# Altium PCB Cube Brain.PcbDoc
Units mm, origin at the board's own origin, x right, y up, seen from the top; angles counter-clockwise.
Board outline 36.4 x 36.4 mm, 4 copper layers (Top Layer, Layer 1, Layer 2, Bottom Layer), stack 1.571 mm thick; 89 components, 64 nets, 260 pads, 177 vias.
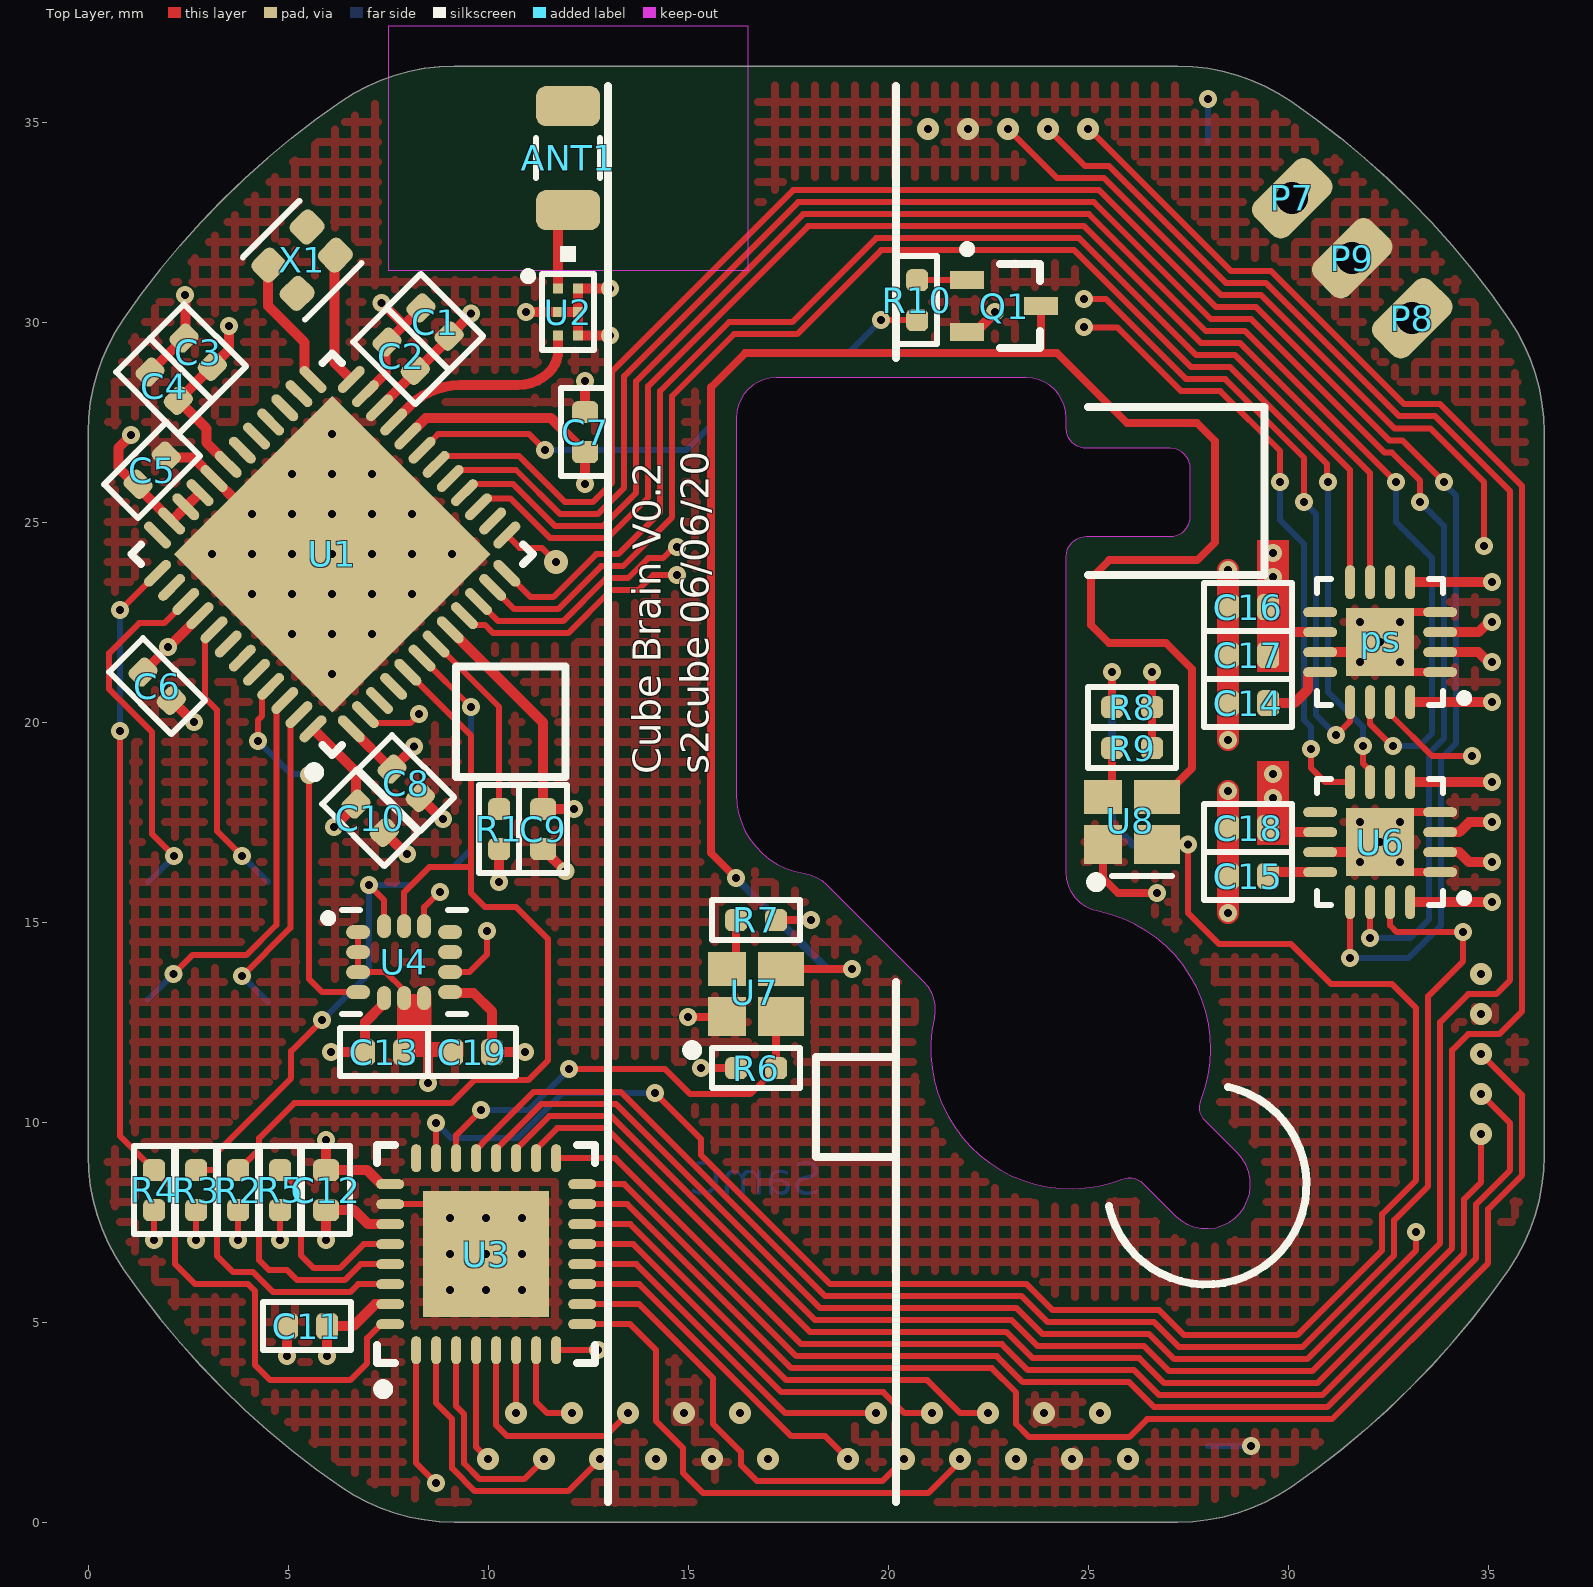
[diagram p0: Top Layer view]
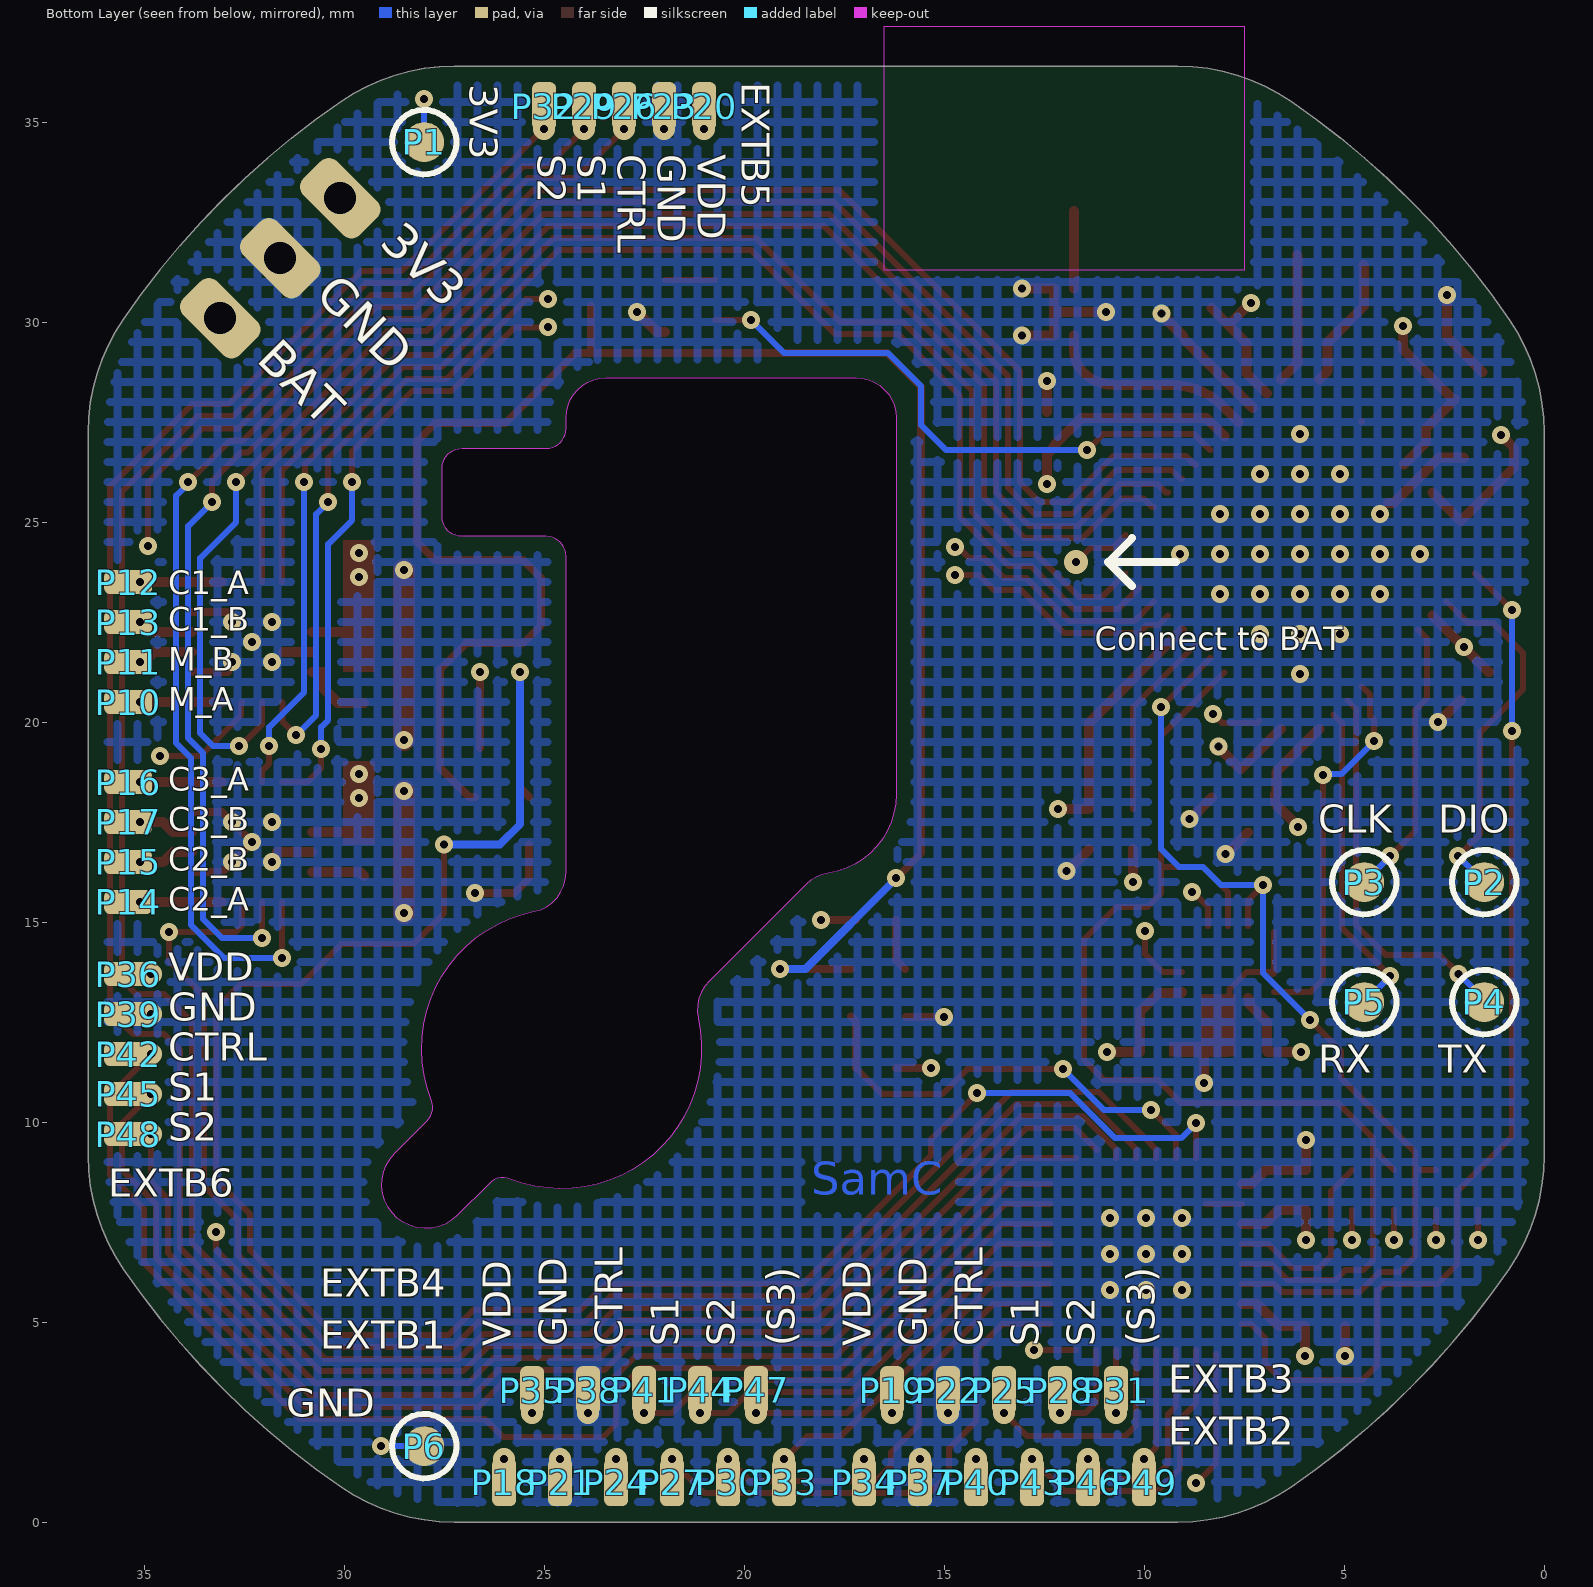
[diagram p1: Bottom Layer view, seen from below]
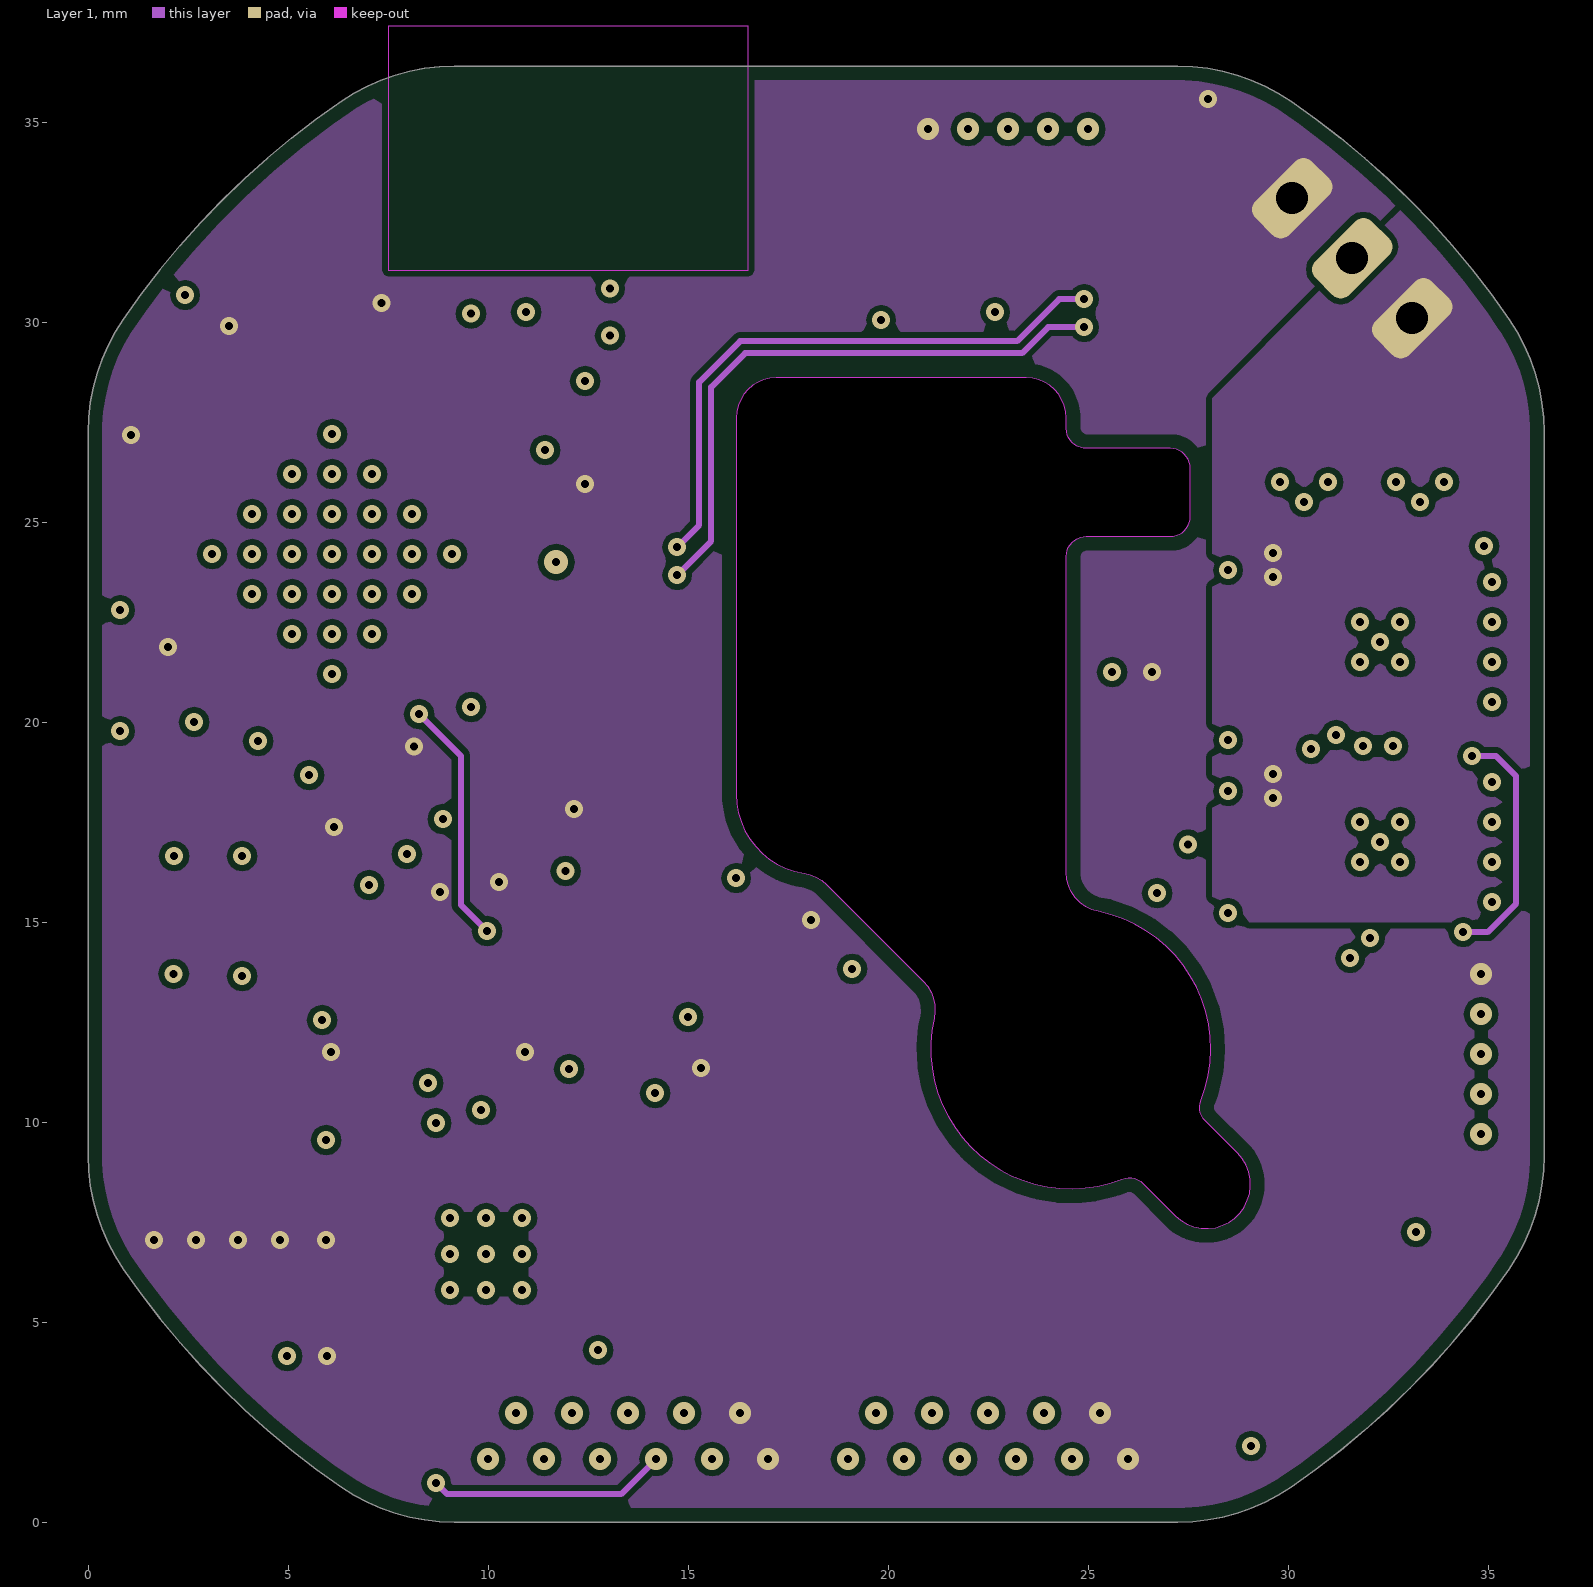
[diagram p2: Layer 1]
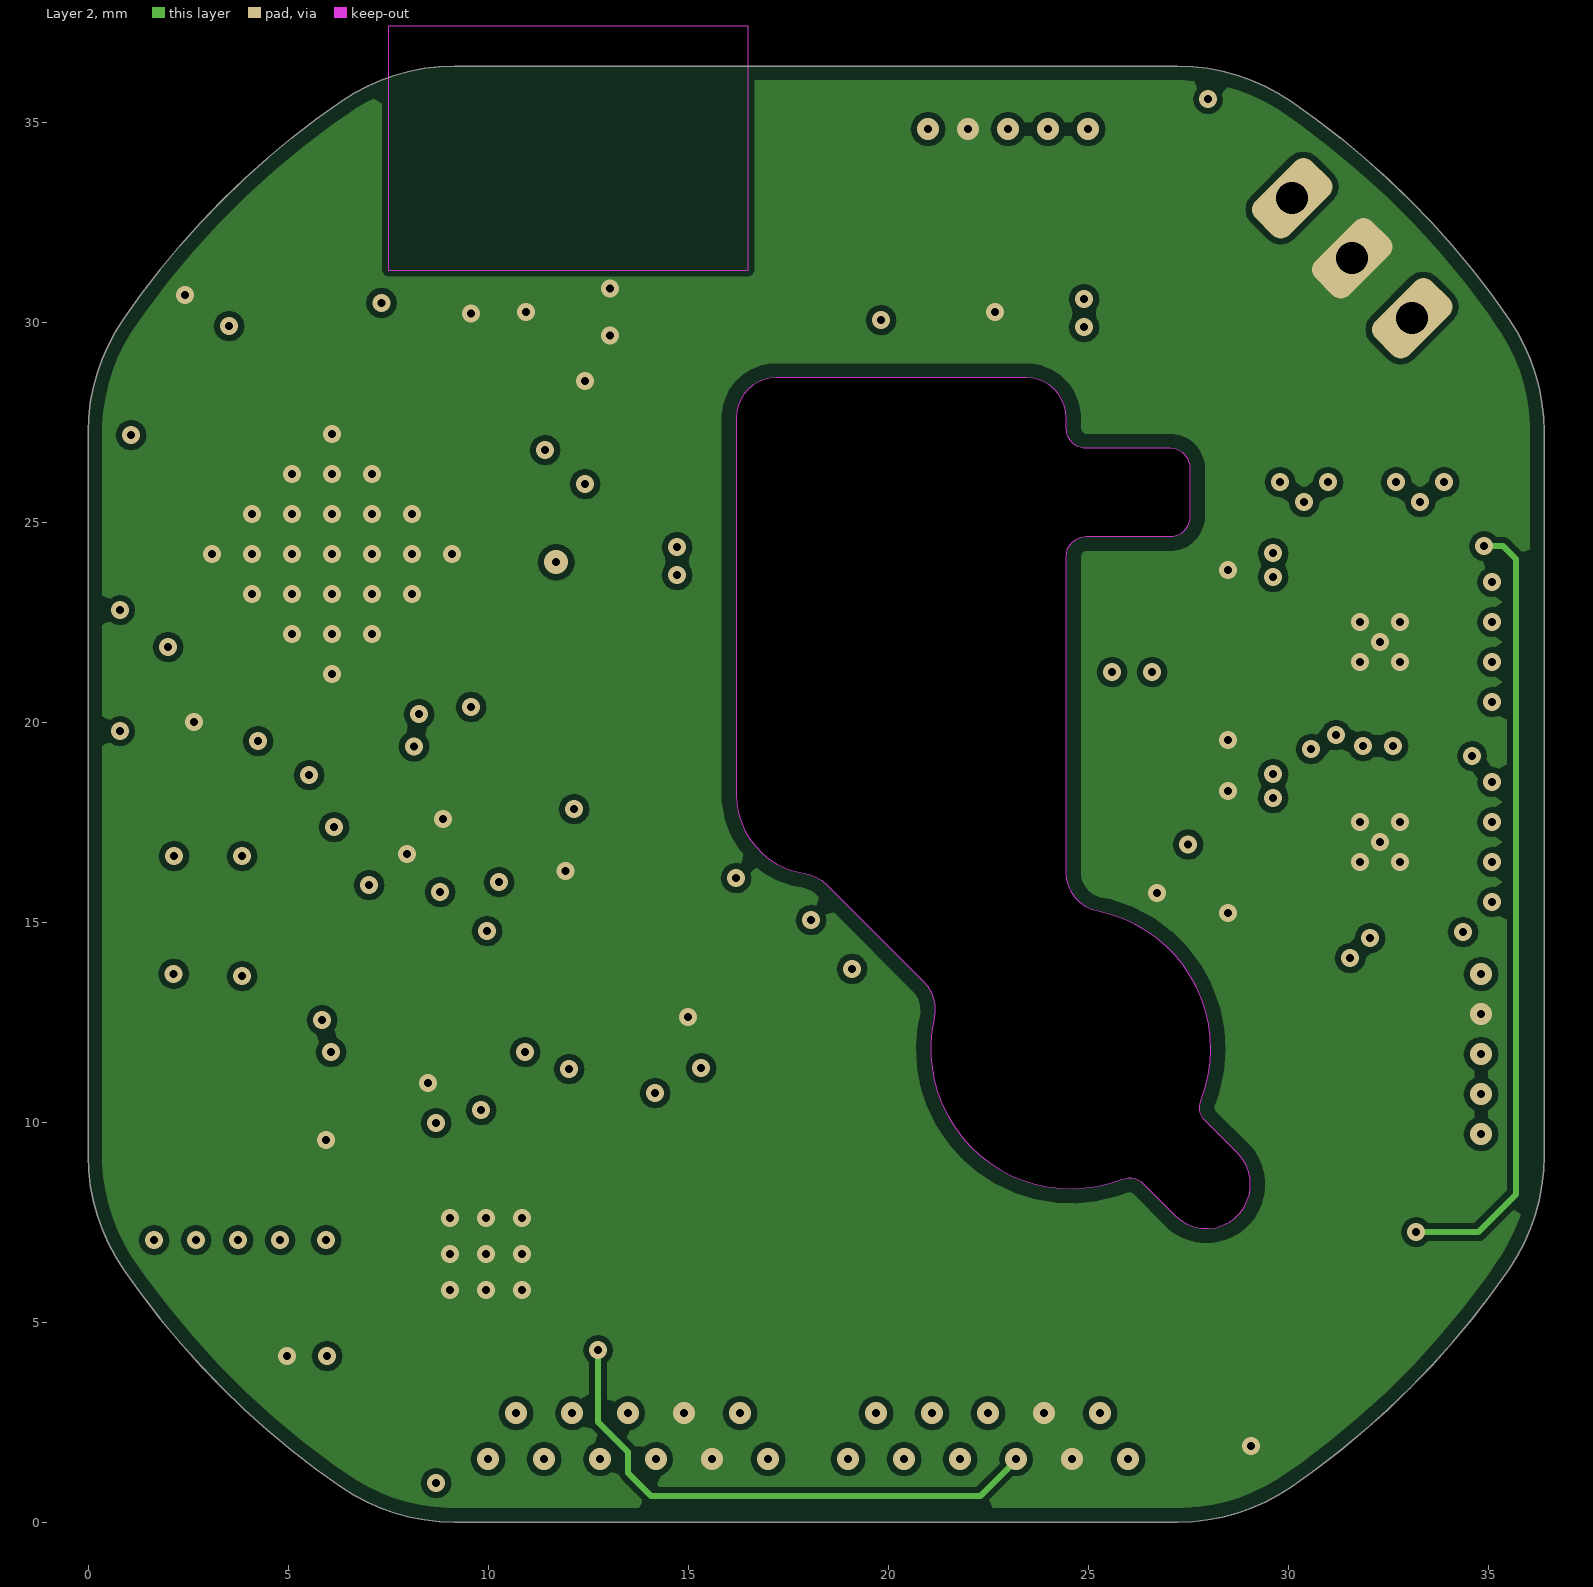
[diagram p3: Layer 2]
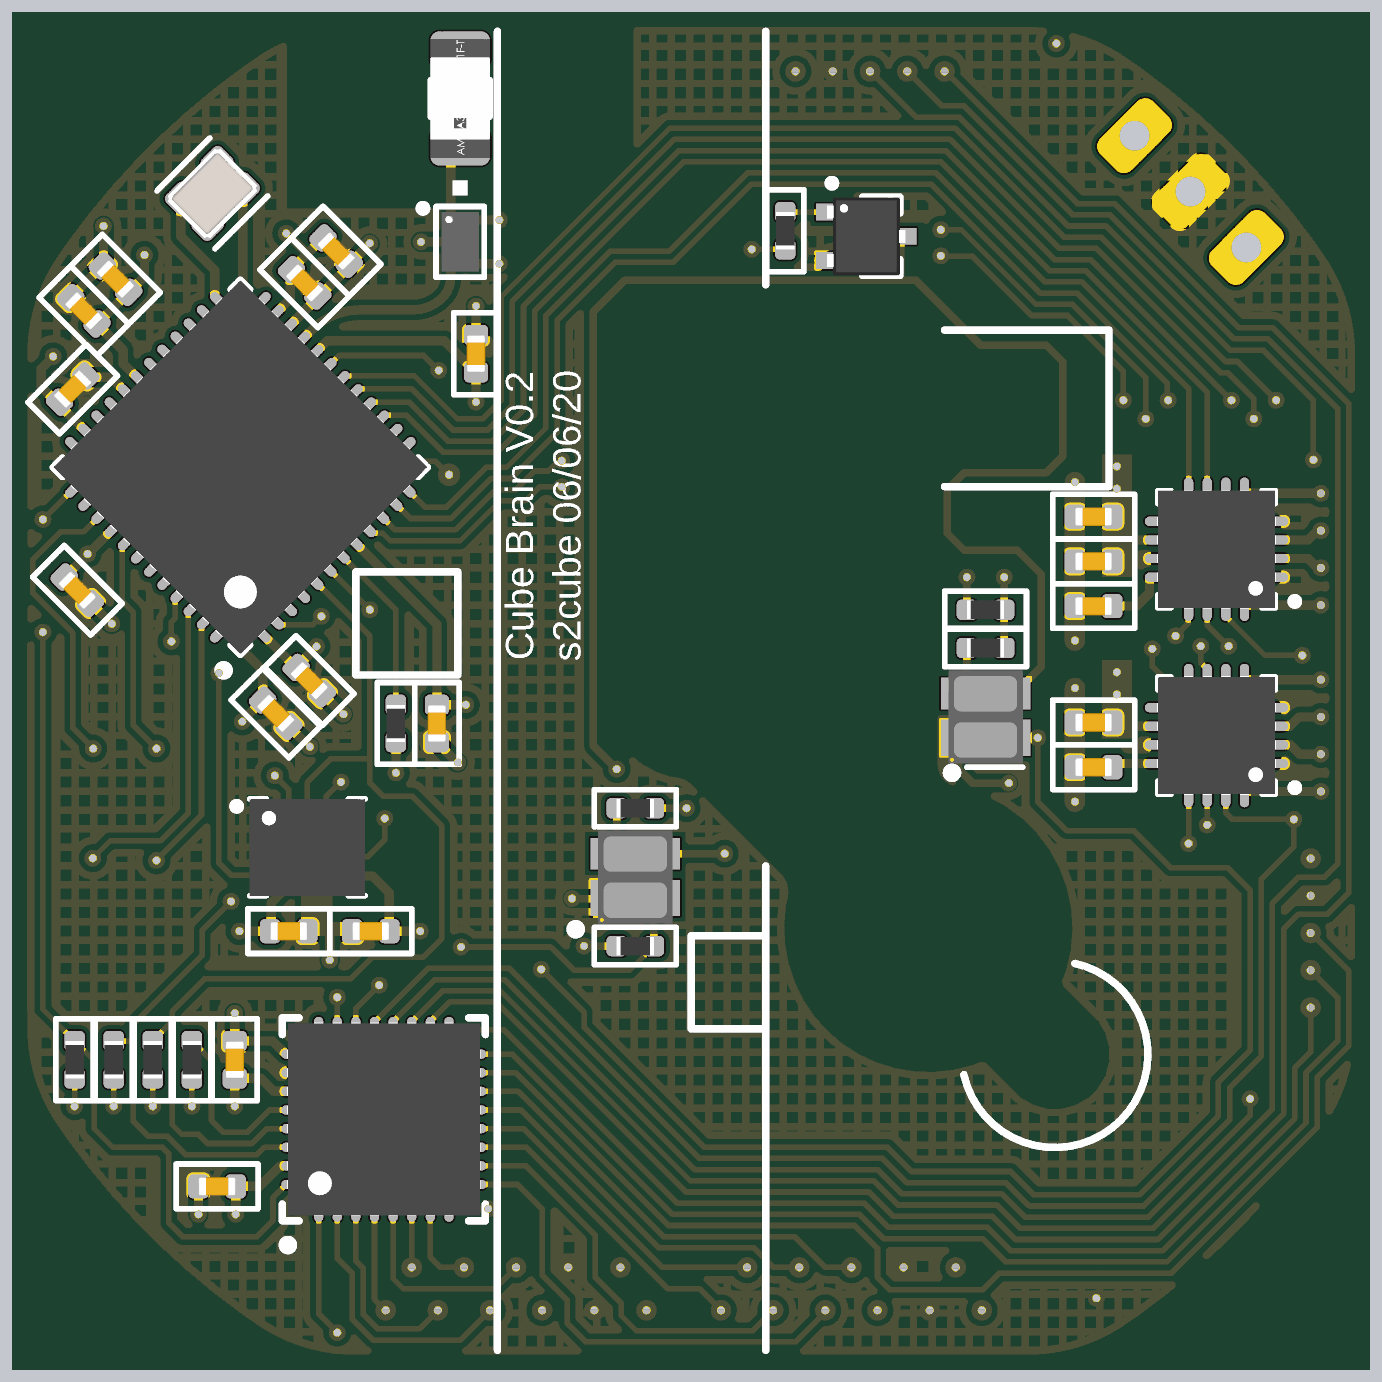
[diagram p4: 3D render of the assembled board from above, using the file's embedded part models]

## Layer stack, top to bottom
Top Solder: solder mask 0.0102, Solder Resist, Dk 3.5
Top Layer: signal copper 0.035
Dielectric 2: prepreg 0.2, PP-006, Dk 4.1
Layer 1: signal copper 0.018
Dielectric 1: dielectric 1.065, FR-4, Dk 4.8
Layer 2: signal copper 0.018
Dielectric 3: prepreg 0.2, PP-006, Dk 4.1
Bottom Layer: signal copper 0.035
Bottom Solder: solder mask 0.0102, Solder Resist, Dk 3.5

## Board outline
6.332,0.875 cw(c18.2,18.2) 0.875,6.332 cw(c5,9.158) 0,9.158 0,27.242 cw(c5,27.242) 0.875,30.068 cw(c18.2,18.2) 6.332,35.525 cw(c9.158,31.4) 9.158,36.4 27.242,36.4 cw(c27.242,31.4) 30.068,35.525 cw(c18.2,18.2) 35.525,30.068 cw(c31.4,27.242) 36.4,27.242 36.4,9.158 cw(c31.4,9.158) 35.525,6.332 cw(c18.2,18.2) 30.068,0.875 cw(c27.242,5) 27.242,0 9.158,0 cw(c9.158,5)
cut-out: 18.459,15.941 20.879,13.521 cw(c20.172,12.814) 21.148,12.597 ccw(c24.564,11.836) 25.842,8.578 cw(c26.025,8.112) 26.378,8.466 27.18,7.664 ccw(c27.958,8.442) 28.736,9.22 27.934,10.022 cw(c28.288,10.375) 27.822,10.558 ccw(c24.564,11.836) 25.255,15.267 cw(c25.452,16.248) 24.452,16.248 24.452,24.144 cw(c24.952,24.144) 24.952,24.644 27.052,24.644 ccw(c27.052,25.144) 27.552,25.144 27.552,26.344 ccw(c27.052,26.344) 27.052,26.844 24.952,26.844 cw(c24.952,27.344) 24.452,27.344 24.452,27.608 ccw(c23.452,27.608) 23.452,28.608 17.2,28.608 ccw(c17.2,27.608) 16.2,27.608 16.2,18.2 ccw(c18.2,18.2) 17.901,16.223 cw(c17.752,15.234)

## Design rules (kind name [scope] priority, off if disabled: settings)
BoardOutlineClearance [All] p1: gap=0.35 ignorepadtopadclearanceinfootprint=FALSE
Clearance [All] p1: gap=0.15 ignorepadtopadclearanceinfootprint=FALSE except(0.25: Arc-Hole Track-Hole SMDPad-Hole THPad-Hole Via-Hole Fill-Hole Poly-Hole Region-Hole Text-Hole)
ComponentClearance [All] p1: gap=0.1 collisioncheckmode=3 verticalgap=0.2 showdistances=TRUE
DiffPairsRouting [All] p1: maxlimit=100 minlimit=0.15 mostfreqgap=0.15 toplayer_minwidth=0.15 toplayer_maxwidth=10 toplayer_prefwidth=0.15 midlayer1_minwidth=0.15 midlayer1_maxwidth=10 midlayer1_prefwidth=0.15 midlayer2_minwidth=0.15 midlayer2_maxwidth=10 midlayer2_prefwidth=0.15 bottomlayer_minwidth=0.15 bottomlayer_maxwidth=10 bottomlayer_prefwidth=0.15 maxuncoupledlength=12.7
Height [All] p1: minheight=0 maxheight=100 prefheight=10
HoleSize [All] p1: absolutevalues=TRUE maxlimit=6.3 minlimit=0.2 maxpercent=80.000 minpercent=20.000
HoleToHoleClearance [All] p1: gap=0.5 allowstackedmicrovias=TRUE
MinimumAnnularRing [All] p1: minimumring=0.12
MinimumSolderMaskSliver [All] p1: minsoldermaskwidth=0
PlaneClearance [All] p1: clearance=0.2
PlaneConnect [All] p1: planeconnectstyle=Direct reliefexpansion=0.3 reliefentries=4 reliefconductorwidth=0.2 reliefairgap=0.2
PolygonConnect [All] p1: connectstyle=Direct reliefconductorwidth=0.2 reliefentries=4 polygonreliefangle="90 Angle" airgapwidth=0.2
RoutingCorners [All] p1: cornerstyle=45-Degree minsetback=2.5 maxsetback=2.5
RoutingVias [All] p1: holewidth=0.2 width=0.45 viastyle="Through Hole" minholewidth=0.2 minwidth=0.45 maxholewidth=6.3 maxwidth=10
SilkToSilkClearance [All] p1: silktosilkclearance=0
SilkToSolderMaskClearance [IsPad] p1: minsilkscreentomaskgap=0 clearancetoexposedcopper=TRUE
SolderMaskExpansion [All] p1: expansion=0.05 istentingtop=FALSE
Width [All] p1: maxlimit=50 minlimit=0.15 preferedwidth=0.15
19 further rules are at their usual default settings.

## Components (designator, comment, footprint, x,y, rotation, side; value= is the part's Value field where it differs from the comment)
ANT1 "AMCA31-2R450G-S1F-T3" AMCA31-2R450G-S1F-T3 12,34.1 r0 top
C1 "100nF" CAPC0402X05N 8.671,30.004 r315 top
C2 "100pF" CAPC0402X05N 7.825,29.15 r315 top
C3 "10uF" CAPC0402X05N 2.75,29.25 r135 top
C4 "10uF" CAPC0402X05N 1.9,28.4 r135 top
C5 "100nF" CAPC0402X05N 1.6,26.3 r45 top
C6 "100nF" CAPC0402X05N 1.725,20.9 r315 top
C7 "100nF" CAPC0402X05N 12.425,27.25 r90 top
C8 "100nF" CAPC0402X05N 7.95,18.475 r315 top
C9 "100nF" CAPC0402X05N 11.375,17.325 r270 top
C10 "100nF" CAPC0402X05N 7.05,17.6 r315 top
C11 "100nF" CAPC0402X05N 5.475,4.9 r180 top
C12 "100nF" CAPC0402X05N 5.95,8.3 r90 top
C13 "100nF" CAPC0402X05N 7.4,11.75 r0 top
C14 "4.7uF" CAPC0402X05N 29,20.475 r180 top
C15 "4.7uF" CAPC0402X05N 29,16.15 r180 top
C16 "10uF" CAPC0402X05N 29,22.875 r180 top
C17 "100nF" CAPC0402X05N 29,21.675 r180 top
C18 "100nF" CAPC0402X05N 29,17.35 r180 top
C19 "100nF" CAPC0402X05N 9.6,11.75 r180 top
P1 "PAD_3" R_PAD 28,34.5 r270 bottom locked
P2 "PAD_3" R_PAD 1.5,16 r270 bottom
P3 "PAD_3" R_PAD 4.5,16 r270 bottom
P4 "PAD_3" R_PAD 1.5,13 r270 bottom
P5 "PAD_3" R_PAD 4.5,13 r270 bottom
P6 "PAD_3" R_PAD 28,1.9 r270 bottom locked
P7 "PAD_2" BATT_PAD 30.1,33.1 r135 top locked
P8 "PAD_2" BATT_PAD 33.1,30.1 r135 top locked
P9 "PAD_2" BATT_PAD 31.6,31.6 r135 top locked
P10 "PAD_4" PAD_B2B 35.4,20.5 r0 bottom
P11 "PAD_4" PAD_B2B 35.4,21.5 r0 bottom
P12 "PAD_4" PAD_B2B 35.4,23.5 r0 bottom
P13 "PAD_4" PAD_B2B 35.4,22.5 r0 bottom
P14 "PAD_4" PAD_B2B 35.4,15.5 r0 bottom
P15 "PAD_4" PAD_B2B 35.4,16.5 r0 bottom
P16 "PAD_4" PAD_B2B 35.4,18.5 r0 bottom
P17 "PAD_4" PAD_B2B 35.4,17.5 r0 bottom
P18 "PAD_4" PAD_B2B 26,1 r90 bottom
P19 "PAD_4" PAD_B2B 16.3,3.3 r90 bottom
P20 "PAD_4" PAD_B2B 21,35.4 r270 bottom
P21 "PAD_4" PAD_B2B 24.6,1 r90 bottom
P22 "PAD_4" PAD_B2B 14.9,3.3 r90 bottom
P23 "PAD_4" PAD_B2B 22,35.4 r270 bottom
P24 "PAD_4" PAD_B2B 23.2,1 r90 bottom
P25 "PAD_4" PAD_B2B 13.5,3.3 r90 bottom
P26 "PAD_4" PAD_B2B 23,35.4 r270 bottom
P27 "PAD_4" PAD_B2B 21.8,1 r90 bottom
P28 "PAD_4" PAD_B2B 12.1,3.3 r90 bottom
P29 "PAD_4" PAD_B2B 24,35.4 r270 bottom
P30 "PAD_4" PAD_B2B 20.4,1 r90 bottom
P31 "PAD_4" PAD_B2B 10.7,3.3 r90 bottom
P32 "PAD_4" PAD_B2B 25,35.4 r270 bottom
P33 "PAD_4" PAD_B2B 19,1 r90 bottom
P34 "PAD_4" PAD_B2B 17,1 r90 bottom
P35 "PAD_4" PAD_B2B 25.3,3.3 r90 bottom
P36 "PAD_4" PAD_B2B 35.4,13.7 r0 bottom
P37 "PAD_4" PAD_B2B 15.6,1 r90 bottom
P38 "PAD_4" PAD_B2B 23.9,3.3 r90 bottom
P39 "PAD_4" PAD_B2B 35.4,12.7 r180 bottom
P40 "PAD_4" PAD_B2B 14.2,1 r90 bottom
P41 "PAD_4" PAD_B2B 22.5,3.3 r90 bottom
P42 "PAD_4" PAD_B2B 35.4,11.7 r180 bottom
P43 "PAD_4" PAD_B2B 12.8,1 r90 bottom
P44 "PAD_4" PAD_B2B 21.1,3.3 r90 bottom
P45 "PAD_4" PAD_B2B 35.4,10.7 r0 bottom
P46 "PAD_4" PAD_B2B 11.4,1 r90 bottom
P47 "PAD_4" PAD_B2B 19.7,3.3 r90 bottom
P48 "PAD_4" PAD_B2B 35.4,9.7 r180 bottom
P49 "PAD_4" PAD_B2B 10,1 r90 bottom
ps "DRV8833RTYR" DRV8833CRTER 32.3,22 r180 top (schematic designator U5)
Q1 "SSM3K36TU" SSM3K36TU 22.9,30.4 r0 top
R1 "12K" RESC0402X04N 10.275,17.325 r270 top
R2 "12K" RESC0402X04N 3.75,8.3 r270 top
R3 "12K" RESC0402X04N 2.7,8.3 r270 top
R4 "12K" RESC0402X04N 1.65,8.3 r270 top
R5 "12K" RESC0402X04N 4.8,8.3 r270 top
R6 "330R" RESC0402X04N 16.7,11.35 r180 top
R7 "330R" RESC0402X04N 16.7,15.05 r0 top
R8 "330R" RESC0402X04N 26.1,20.375 r0 top
R9 "330R" RESC0402X04N 26.1,19.35 r0 top
R10 "330R" RESC0402X04N 20.725,30.55 r270 top
U1 "STM32WB50CGU5" STM32WB50CGU5 6.1,24.2 r135 top locked
U2 "MLPF-WB55-01E3" MLPF-WB55-01E3 12,30.25 r0 top
U3 "TCA6424ARGJR" TCA6424ARGJR 9.95,6.7 r90 top
U4 "LSM6DSMTR" LSM6DSMTR 7.9,14 r0 top
U6 "DRV8833RTYR" DRV8833CRTER 32.3,17 r180 top locked
U7 "VCNT2020" VCNT2020 16.7,13.2 r90 top locked
U8 "VCNT2020" VCNT2020 26.1,17.5 r90 top locked
X1 "32MHz" XRCGB32M000F1H01R0 5.35,31.55 r225 top

## Footprints (in the part's own frame and the unit in brackets; to place one, negate y for a bottom-side part, rotate by r counter-clockwise, add the part's x,y. Pads: shape width x height; smd on the part's side, far side on the other; paste and mask are expansions set on the pad)
AMCA31-2R450G-S1F-T3 [mm]
  rrect50% 1.6x1 smd: 1(0,-1.3) 2(0,1.3)
  silkscreen extent -0.8,-2.6 0.8,0.5, body extent -0.8,-1.6 0.8,1.6, height 1.21
BATT_PAD [mm]
  rrect50% 1.2x2 hole 0.8: 1(0,0)
CAPC0402X05N [mm] "Chip Capacitor, 2-Leads, Body 1.00x0.50mm, IPC Medium Density"
  rrect50% 0.55x0.65 smd: 1(-0.5,0) 2(0.5,0)
  silkscreen extent -1.1,-0.6 1.1,0.6, body extent -0.5,-0.25 0.5,0.25, height 0.5
DRV8833CRTER [mm] "QFN, 16-Leads, Body 3.00x3.00mm, Pitch 0.50mm, Thermal Pad 1.66x1.66mm, IPC Medium Density"
  oval 0.85x0.25 smd: 1(-1.5,0.75) 2(-1.5,0.25) 3(-1.5,-0.25) 4(-1.5,-0.75) 9(1.5,-0.75) 10(1.5,-0.25) 11(1.5,0.25) 12(1.5,0.75)
  oval 0.25x0.85 smd: 5(-0.75,-1.5) 6(-0.25,-1.5) 7(0.25,-1.5) 8(0.75,-1.5) 13(0.75,1.5) 14(0.25,1.5) 15(-0.25,1.5) 16(-0.75,1.5)
  rect 1.7x1.7 smd: 17(0,0)
  silkscreen extent -2.2,-1.58 1.58,1.58, body extent -1.6,-1.6 1.6,1.6, height 0.8
LSM6DSMTR [mm] "PQFN, 14-Leads, Body 3.00x2.50mm, Pitch 0.50mm, IPC Medium Density"
  oval 0.6x0.35 smd: 1(-1.15,0.75) 2(-1.15,0.25) 3(-1.15,-0.25) 4(-1.15,-0.75) 8(1.15,-0.75) 9(1.15,-0.25) 10(1.15,0.25) 11(1.15,0.75)
  oval 0.35x0.6 smd: 5(-0.5,-0.9) 6(0,-0.9) 7(0.5,-0.9) 12(0.5,0.9) 13(0,0.9) 14(-0.5,0.9)
  silkscreen extent -2,-1.3 1.55,1.3, body extent -1.55,-1.3 1.55,1.3, height 0.86
MLPF-WB55-01E3 [mm] "MLPF-WB55-01E3"
  rect 0.25x0.25 smd: 1(-0.25,0.587) 2(-0.25,0) 3(-0.25,-0.587) 4(0.25,-0.587) 5(0.25,0) 6(0.25,0.587)
  silkscreen extent -1.1,-0.95 0.65,1, body extent -0.5,-0.8 0.5,0.8, height 0.45
PAD_B2B [mm]
  rrect50% 1.2x0.6 smd: 1(0,0)
R_PAD [mm]
  round 1 smd: 1(0,0)
  silkscreen extent -0.81,-0.81 0.81,0.8
RESC0402X04N [mm] "Chip Resistor, 2-Leads, Body 1.00x0.50mm, IPC Medium Density"
  rrect50% 0.55x0.55 smd: 1(-0.5,0) 2(0.5,0)
  silkscreen extent -1.1,-0.5 1.1,0.5, body extent -0.5,-0.25 0.5,0.25, height 0.35
SSM3K36TU [mm] "SOTFL, 3-Leads, Body 2.00x2.10mm, Pitch 0.65mm, IPC Medium Density"
  rect 0.85x0.45 smd: 1(-0.925,0.65) 2(-0.925,-0.65) 3(0.925,0)
  silkscreen extent -1.02,-1.05 0.9,1.52, body extent -1.05,-1.05 1.05,1.05, height 0.75
STM32WB50CGU5 [mm] "QFN, 48-Leads, Body 7.00x7.00mm, Pitch 0.50mm, Thermal Pad 5.60x5.60mm, IPC Medium Density"
  oval 0.85x0.25 smd: 1(-3.425,2.75) 2(-3.425,2.25) 3(-3.425,1.75) 4(-3.425,1.25) 5(-3.425,0.75) 6(-3.425,0.25) 7(-3.425,-0.25) 8(-3.425,-0.75) 9(-3.425,-1.25) 10(-3.425,-1.75) 11(-3.425,-2.25) 12(-3.425,-2.75) 25(3.425,-2.75) 26(3.425,-2.25) 27(3.425,-1.75) 28(3.425,-1.25) 29(3.425,-0.75) 30(3.425,-0.25) 31(3.425,0.25) 32(3.425,0.75) 33(3.425,1.25) 34(3.425,1.75) 35(3.425,2.25) 36(3.425,2.75)
  oval 0.25x0.85 smd: 13(-2.75,-3.425) 14(-2.25,-3.425) 15(-1.75,-3.425) 16(-1.25,-3.425) 17(-0.75,-3.425) 18(-0.25,-3.425) 19(0.25,-3.425) 20(0.75,-3.425) 21(1.25,-3.425) 22(1.75,-3.425) 23(2.25,-3.425) 24(2.75,-3.425) 37(2.75,3.425) 38(2.25,3.425) 39(1.75,3.425) 40(1.25,3.425) 41(0.75,3.425) 42(0.25,3.425) 43(-0.25,3.425) 44(-0.75,3.425) 45(-1.25,3.425) 46(-1.75,3.425) 47(-2.25,3.425) 48(-2.75,3.425)
  rect 5.6x5.6 smd: 49(0,0)
  silkscreen extent -3.66,-3.55 3.55,4.3, body extent -3.57,-3.57 3.57,3.57, height 0.6
TCA6424ARGJR [mm] "QFN, 32-Leads, Body 5.00x5.00mm, Pitch 0.50mm, Thermal Pad 3.15x3.15mm, IPC Medium Density"
  oval 0.7x0.25 smd: 1(-2.4,1.75) 2(-2.4,1.25) 3(-2.4,0.75) 4(-2.4,0.25) 5(-2.4,-0.25) 6(-2.4,-0.75) 7(-2.4,-1.25) 8(-2.4,-1.75) 17(2.4,-1.75) 18(2.4,-1.25) 19(2.4,-0.75) 20(2.4,-0.25) 21(2.4,0.25) 22(2.4,0.75) 23(2.4,1.25) 24(2.4,1.75)
  oval 0.25x0.7 smd: 9(-1.75,-2.4) 10(-1.25,-2.4) 11(-0.75,-2.4) 12(-0.25,-2.4) 13(0.25,-2.4) 14(0.75,-2.4) 15(1.25,-2.4) 16(1.75,-2.4) 25(1.75,2.4) 26(1.25,2.4) 27(0.75,2.4) 28(0.25,2.4) 29(-0.25,2.4) 30(-0.75,2.4) 31(-1.25,2.4) 32(-1.75,2.4)
  rect 3.15x3.15 smd: 33(0,0)
  silkscreen extent -3.5,-2.73 2.73,2.73, body extent -2.6,-2.6 2.6,2.6, height 0.6
VCNT2020 [mm] "4-SMD"
  rect 0.97x0.95 smd: 1(-0.56,0.725)
  rect 0.97x1.15 smd: 2(-0.56,-0.625)
  rect 0.85x0.95 smd: 3(0.63,0.725)
  rect 0.85x1.15 smd: 4(0.63,-0.625)
  silkscreen extent -1.52,-1 1.35,1.72, body extent -1.25,-1 1.25,1, height 0.81
XRCGB32M000F1H01R0 [mm]
  rrect50% 0.75x0.7 smd: 1(-0.675,0.5) 2(-0.675,-0.5) 2(0.675,0.5) 3(0.675,-0.5)
  silkscreen extent -1,-1.1 1,1.1, body extent -1,-0.8 1,0.8, height 0.66

## Part data
ANT1: "RF ANT 2.4GHZ CHIP SOLDER SMD", Case=3.2X1.6X1.2mm, Manufacturer="Abracon LLC", Supplier Part Number 1=535-14095-1-ND, Categories="RF Antennas", Manufacturer Part Number=AMCA31-2R450G-S1F-T3, Supplier 1=Digi-Key
C1 C5 C6 C7 C8 C9 C10 C11 C12 C13 C17 C18 C19: library part "CER 100NF 16V", "CAP CER 0.1UF 16V X7R 0402", Manufacturer="Samsung Electro-Mechanics", Manufacturer Part Number=CL05B104KO5NNNC, Package / Case=0402, Supplier Part Number 1=C1525, Voltage - Rated=16V, Capacitance=100nF, Category=Capacitors, Supplier 1=LCSC
C2: library part "CER 100PF 50V", "CAP CER 100PF 50V C0G/NP0 0402", Manufacturer="Samsung Electro-Mechanics", Manufacturer Part Number=CL05C101JB5NNNC, Package / Case=0402, Supplier Part Number 1=C26409, Voltage - Rated=50V, Capacitance=100pF, Category=Capacitors, Supplier 1=LCSC
C3 C4 C16: library part "CER 10UF 10V", "CAP CER 10UF 10V X5R 0402", Manufacturer="Murata Electronics", Manufacturer Part Number=GRM155R61A106ME44D, Package / Case=0402, Supplier Part Number 1=C77000, Voltage - Rated=10V, Capacitance=10uF, Category=Capacitors, Supplier 1=LCSC
C14 C15: library part "CER 4.7UF 10V", "CAP CER 4.7UF 10V X5R 0402", Manufacturer="Samsung Electro-Mechanics", Manufacturer Part Number=CL05A475MP5NRNC, Package / Case=0402, Supplier Part Number 1=C23733, Voltage - Rated=10V, Capacitance=4.7uF, Category=Capacitors, Supplier 1=LCSC
P1 P2 P3 P4 P5 P6: "a Round Pad"
P7 P8 P9: "a Pad"
P10 P11 P12 P13 P14 P15 P16 P17 P18 P19 P20 P21 P22 P23 P24 P25 P26 P27 P28 P29 P30 P31 P32 P33 P34 P35 P36 P37 P38 P39 P40 P41 P42 P43 P44 P45 P46 P47 P48 P49: "a Pad for board to board connection"
ps U6: "IC MOTOR DRIVER", Case="16-WQFN Exposed Pad", Manufacturer="Texas Instruments", Supplier Part Number 1=C154936, Categories="Motor Drivers, Controllers", Manufacturer Part Number=DRV8833RTYR, Supplier 1=LCSC
Q1: "N-Channel 20V 500mA (Ta) 800mW (Ta) Surface Mount UFM", Case=UFM, Manufacturer="Toshiba Semiconductor and Storage", Supplier Part Number 1=Digi-Key, Categories=Transistors, Manufacturer Part Number=SSM3K36TU, Supplier 1=SSM3K36TULFCT-ND
R1 R2 R3 R4 R5: library part "RES 12K", "RES SMD 12K OHM 1% 1/16W 0402", Manufacturer=YAGEO, Manufacturer Part Number=RC0402FR-0712KL, Package / Case=0402, Supplier Part Number 1=C114760, Category=Resistors, Resistance=12K, Supplier 1=LCSC
R6 R7 R8 R9 R10: library part "RES 330R", "RES SMD 330R OHM 1% 1/16W 0402", Manufacturer=YAGEO, Manufacturer Part Number=RC0402FR-07330RL, Package / Case=0402, Supplier Part Number 1=C105875, Category=Resistors, Resistance=330R, Supplier 1=LCSC
U1: "ULTRA-LOW-POWER DUAL CORE ARM CO", Case="48-UFQFN Exposed Pad", Manufacturer=STMicroelectronics, Supplier Part Number 1=497-STM32WB50CGU5-ND, Categories="RF Transceiver ICs", Manufacturer Part Number=STM32WB50CGU5, Supplier 1=Digi-Key
U2: "RF FILTER LOW PASS 2.45GHZ 6SMD", Case="6-SMD, No Lead", Frequency="2.45GHz Center", Manufacturer=STMicroelectronics, Supplier Part Number 1=497-19088-1-ND, Bandwidth=100MHz, Categories="RF Filters", Manufacturer Part Number=MLPF-WB55-01E3, Supplier 1=Digi-Key
U3: "IC I/O EXPANDER I2C 24B 32UQFN", Case="32-UFQFN Exposed Pad", Manufacturer="Texas Instruments", Supplier Part Number 1=C80692, Categories="I/O Expanders", Manufacturer Part Number=TCA6424ARGJR, Supplier 1=LCSC
U4: "IMU ACCEL/GYRO I2C/SPI 14LGA", Case="14-VFLGA Module", Manufacturer=STMicroelectronics, Supplier Part Number 1=497-16696-1-ND, Categories="IMUs (Inertial Measurement Units)", Manufacturer Part Number=LSM6DSMTR, Supplier 1=Digi-Key
U7 U8: "REFLECTIVE SENSOR WITH PTR OUTPU", Case="4-SMD Module", Manufacturer="Vishay Semiconductor Opto Division", Supplier Part Number 1=161-2156, Category="Optical Sensors", Manufacturer Part Number=VCNT2020, Supplier 1=RS
X1: library part XRCGB32M000F1H01R0, "2.0X1.6X0.65MM 32MHZ CRYSTAL", Case=SMD, Manufacturer="Murata Electronics", Supplier Part Number 1=490-18334-1-ND, Categories=Crystals, Manufacturer Part Number=XRCGB32M000F1H01R0, Supplier 1=Digi-Key

## Via types
v1: diameter 0.45, hole 0.2, Top Layer to Bottom Layer, tented both sides, 144 vias
v2: diameter 0.55, hole 0.2, Top Layer to Bottom Layer, tented both sides, 32 vias
v3: diameter 0.6, hole 0.2, Top Layer to Bottom Layer, 1 vias

## Nets (pads, with @x,y where several pads share a name; then routed paths per layer and width w, separated by ;. In a path a pad name is that pad's centre, name@x,y a point inside that pad or via, vN(x,y) a via of type N, cw(c..) or ccw(c..) an arc to the next point about the centre after c; other vN are vias at no path point)
ANT: ANT1.1 U2.1 | length 1.9
  Top Layer w0.25: U2.1 ANT1.1@11.75,32.775
BATT+: C16.1 C17.1 C18.1 P8.1 ps.10 U6.10 | length 4.9
  Top Layer w0.2: P8.1@33.019,29.333 33.019,30.019 P8.1
  Top Layer w0.25: C18.1 29.6,17.25 U6.10 ; C16.1@29.625,22.9 29.5,22.775 29.5,21.725 30.025,22.25 ps.10
  other v1: 29.625,18.1 29.625,18.7 29.625,23.625 29.625,24.225
EXTB1_CTRL: P24.1 U3.8 | length 14.8
  Top Layer w0.15: U3.8 v1(12.75,4.3)
  Layer 2 w0.15: v1(12.75,4.3) 12.75,2.5 13.5,1.75 13.5,1.225 14.025,0.7 14.075,0.65 22.3,0.65 23.2,1.55 v2(23.2,1.575)
EXTB1_S1: P27.1 U3.9 | length 13
  Top Layer w0.15: U3.9 13.55,4.95 14.2,4.3 14.2,2.525 14.875,1.85 14.875,1.225 15.375,0.725 21,0.725 21.8,1.525 v2(21.8,1.575)
EXTB1_S2: P30.1 U3.10 | length 11
  Top Layer w0.15: U3.10 13.775,5.45 15.625,3.6 15.625,2.45 16.325,1.75 16.325,1.425 16.725,1.025 19.85,1.025 v2(20.4,1.575)
EXTB1_S3: P33.1 U3.11 | length 8.4
  Top Layer w0.15: U3.11@12.375,5.95 13.782,5.95 17.582,2.15 18.425,2.15 v2(19,1.575)
EXTB2_CTRL: P40.1 U3.1 | length 9.4
  Top Layer w0.15: U3.1@8.2,4.2 8.2,1.475 v1(8.7,0.975)
  Layer 1 w0.15: v1(8.7,0.975) 8.975,0.7 13.325,0.7 v2(14.2,1.575)
EXTB2_S1: P43.1 U3.2 | length 7.4
  Top Layer w0.15: U3.2 8.7,2.975 9.1,2.575 9.1,1.344 9.669,0.775 12,0.775 v2(12.8,1.575)
EXTB2_S2: P46.1 U3.3 | length 5.3
  Top Layer w0.15: U3.3 9.2,2.899 9.4,2.699 9.4,1.468 9.793,1.075 10.9,1.075 v2(11.4,1.575)
EXTB2_S3: P49.1 U3.4 | length 2.8
  Top Layer w0.15: U3.4 9.7,1.875 v2(10,1.575)
EXTB3_CTRL: P25.1 U3.5 | length 5.5
  Top Layer w0.15: U3.5 10.2,2.425 10.475,2.15 12.925,2.15 v2(13.5,2.725)
EXTB3_S1: P28.1 U3.7 | length 2.3
  Top Layer w0.15: U3.7 11.2,3 11.475,2.725 v2(12.1,2.725)
EXTB3_S2: P31.1 U3.6 | length 1.6
  Top Layer w0.15: v2(10.7,2.725) U3.6
EXTB4_CTRL: P41.1 U3.14 | length 12.1
  Top Layer w0.15: U3.14 13.555,7.45 17.455,3.55 20.982,3.55 21.807,2.725 v2(22.5,2.725)
EXTB4_S1: P44.1 U3.13 | length 10.5
  Top Layer w0.15: U3.13 13.631,6.95 17.331,3.25 19.882,3.25 20.407,2.725 v2(21.1,2.725)
EXTB4_S2: P47.1 U3.12 | length 8.9
  Top Layer w0.15: U3.12 13.706,6.45 17.431,2.725 v2(19.7,2.725)
EXTB5_CTRL: P26.1 U3.20 | length 64.8
  Top Layer w0.15: U3.20 10.2,9.325 11.325,10.45 13.201,10.45 18.301,5.35 23.213,5.35 23.863,4.7 26.526,4.7 27.153,4.074 30.475,4.074 33.2,6.799 v1(33.2,7.25) ; v2(23,34.825) 24.225,33.6 25.4,33.6 28.325,30.675 29.324,30.675 32.66,27.339 33.561,27.339 34.9,26 v1(34.9,24.4)
  Layer 2 w0.15: v1(33.2,7.25) 34.75,7.25 35.7,8.2 35.7,24.075 35.375,24.4 v1(34.9,24.4)
EXTB5_S1: P29.1 U3.19 | length 62.9
  Top Layer w0.15: U3.19 10.7,9.325 11.525,10.15 13.076,10.15 18.176,5.05 23.089,5.05 23.739,4.4 26.402,4.4 27.028,3.774 30.6,3.774 33.8,6.974 33.8,12.5 34.5,13.2 35.2,13.2 35.55,13.55 35.55,25.774 33.674,27.65 32.774,27.65 29.449,30.975 28.449,30.975 25.524,33.9 24.925,33.9 v2(24,34.825)
EXTB5_S2: P32.1 U3.18 | length 62
  Top Layer w0.15: U3.18@11.175,9.3 11.725,9.85 12.952,9.85 18.052,4.75 22.965,4.75 23.615,4.1 26.278,4.1 26.904,3.474 30.724,3.474 34.1,6.85 34.1,11.8 34.5,12.2 35.275,12.2 35.85,12.775 35.85,25.349 ; v2(25,34.825) 25.024,34.825 28.574,31.275 29.573,31.275 32.898,27.95 33.799,27.95 35.85,25.899 35.85,25.35
EXTB6_CTRL: P42.1 U3.15 | length 33.3
  Top Layer w0.15: U3.15 13.479,7.95 17.579,3.85 22.592,3.85 23.2,3.242 23.2,2.453 23.528,2.125 26.025,2.125 26.474,2.574 31.097,2.574 35,6.477 35,7.825 35.85,8.675 35.85,10.675 v2(34.825,11.7)
EXTB6_S1: P45.1 U3.16 | length 31
  Top Layer w0.15: U3.16 13.403,8.45 17.703,4.15 22.716,4.15 23.366,3.5 26.025,3.5 26.651,2.874 30.972,2.874 34.7,6.601 34.7,7.949 35.55,8.799 35.55,9.975 v2(34.825,10.7)
EXTB6_S2: P48.1 U3.17 | length 29.8
  Top Layer w0.15: U3.17 13.178,9.1 17.828,4.45 22.84,4.45 23.49,3.8 26.149,3.8 26.775,3.174 30.848,3.174 34.4,6.726 34.4,8.074 34.825,8.499 v2(34.825,9.7)
GND: C1.2 C2.2 C3.2 C4.2 C5.2 C6.2 C7.2 C8.2 C9.2 C10.2 C11.2 C12.2 C13.2 C14.2 C15.2 C16.2 C17.2 C18.2 C19.2 P6.1 P9.1 P21.1 P22.1 P23.1 P37.1 P38.1 P39.1 ps.1 ps.4 ps.11 ps.17 Q1.2 U1.22 U1.32 U1.49 U2.2 U2.4 U2.5 U2.6 U3.25 U3.26 U3.33 U4.1 U4.2 U4.3 U4.6 U4.7 U6.1 U6.4 U6.11 U6.17 U7.1 U8.1 | length 44.1
  Top Layer w0.15: U4.1 U4.2 U4.3 ; U4.3@6.775,13.7 6.75,13.725 U4.3 ; U3.26 U3.33@8.45,7.95 ; U4.6@7.925,13.15 7.862,13.213 7.862,13.329 7.441,13.75 U4.3 ; U7.1@15.96,12.625 U7.1
  Top Layer w0.2: v1(15,12.625) U7.1@15.96,12.625 ; U8.1 25.375,16.1 25.75,15.725 v1(26.725,15.725) ; ps.17@32.9,21.25 ps.1 ; ps.17@32.925,22.75 ps.4 ; U6.1 33.05,16.25 v1(32.3,17) v1(32.8,17.5) 33.05,17.75 U6.4
  Top Layer w0.25: C4.2 C3.2 2.428,29.636 2.428,30.672 v1(2.425,30.675) ; C5.2@2,26.6 2.013,26.613 2.626,26.613 U1.32 3.764,25.475 U1.49@3.9,25.475 ; C6.2 2.091,20.546 2.638,20 v1(2.65,20) ; v1(4.975,4.15) C11.2 ; v1(5.95,9.55) C12.2 6.975,8.8 7.325,8.45 U3.25 ; U1.22 8.95,29.525 C1.2@8.975,29.525 ; C10.2 v1@7.95,16.7 ; C13.2 8.5,11.75 ; C8.2 v1@8.85,17.575 ; v1(8.5,10.975) 8.5,11.75 ; C1.2 v1@9.571,30.196 ; C19.2@9.1,11.793 C19.2 8.5,11.75 ; v1(10.95,30.25) U2.2 U2.5 ; C9.2 v1@11.921,16.279 ; C7.2 v1(12.425,28.525) ; v1(13.05,29.663) U2.4 U2.5 ; v1(13.05,30.837) U2.6 U2.5 ; Q1.2 22.175,29.75 v1(22.675,30.25) ; U6.11 U6.17@31.675,16.75 ; ps.11 ps.17@31.525,21.75
  Top Layer w0.55: v1(28.5,15.225) C15.2 C18.2 v1(28.5,18.275) ; v1(28.5,19.55) C14.2 C17.2 C16.2 v1(28.5,23.8)
  Bottom Layer w0.15: P6.1 v1(29.075,1.9)
  other v1: 9.05,5.8 9.95,5.8 10.85,5.8 9.05,6.7 9.95,6.7 10.85,6.7 9.05,7.6 9.95,7.6 10.85,7.6 11.938,16.279 31.8,16.5 32.8,16.5 7.966,16.7 31.8,17.5 8.866,17.575 6.1,21.2 31.8,21.5 32.8,21.5 32.3,22 5.1,22.2 6.1,22.2 7.1,22.2 31.8,22.5 32.8,22.5 4.1,23.2 5.1,23.2 6.1,23.2 7.1,23.2 8.1,23.2 3.1,24.2 4.1,24.2 5.1,24.2 6.1,24.2 7.1,24.2 8.1,24.2 9.1,24.2 4.1,25.2 5.1,25.2 6.1,25.2 7.1,25.2 8.1,25.2 5.1,26.2 6.1,26.2 7.1,26.2 6.1,27.2 9.571,30.213
  other v2: 15.6,1.575 24.6,1.575 14.9,2.725 23.9,2.725 34.825,12.7 22,34.825
HSE_IN: U1.25 X1.3 | length 3.3
  Top Layer w0.25: X1.3 4.501,31.409 4.501,30.406 5.411,29.497 5.411,28.779 U1.25
HSE_OUT: U1.24 X1.1 | length 3.3
  Top Layer w0.25: X1.1 6.163,31.656 6.163,28.981 U1.24
I2C_SCL: R2.1 U1.5 U3.29 U4.13 | length 29.9
  Top Layer w0.15: R2.1 4.275,9.325 ; U3.29 6.814,6.45 6.414,6.05 5.225,6.05 4.975,6.3 4.525,6.3 4.275,6.55 4.275,9.325 ; U4.13 7.9,15.75 8.525,16.375 9.55,16.375 9.575,16.4 ; U1.5 9.575,19.664 9.575,16.4 ; 4.275,9.325 4.275,9.6 5.15,10.475 9.075,10.475 9.65,11.05 11,11.05 11.5,11.55 11.5,14.575 10.7,15.375 9.925,15.375 9.575,15.725 9.575,16.4
I2C_SDA: R3.1 U1.6 U3.30 U4.14 | length 25.5
  Top Layer w0.15: R3.1 3.225,8.8 ; v1(5.85,12.55) 5.075,11.775 5.075,11.1 3.225,9.25 3.225,8.8 ; v1(7.025,15.925) 7.4,15.55 U4.14 ; U3.30 6.75,5.95 6.55,5.75 4.625,5.75 4.125,6.25 3.625,6.25 3.225,6.65 3.225,8.8 ; U1.6 8.349,21.601 9.571,20.379 v1(9.575,20.379)
  Bottom Layer w0.15: v1(5.85,12.55) 7.025,13.725 v1(7.025,15.925) 8.075,15.925 8.525,16.375 9.125,16.375 9.575,16.825 v1(9.575,20.379)
IMU_INT1: U1.45 U4.4 | length 9.6
  Top Layer w0.15: v1(4.25,19.525) 4.25,20.056 4.35,20.156 4.35,20.682 U1.45 ; v1(5.525,18.675) 5.525,13.575 5.85,13.25 U4.4
  Bottom Layer w0.15: v1(4.25,19.525) 5.075,18.7 5.5,18.7 v1(5.525,18.675)
IMU_INT2: U1.2 U4.9 | length 9.1
  Top Layer w0.15: U1.2@7.125,20.025 7.175,19.975 8.05,19.975 v1(8.275,20.2) ; U4.9 9.529,13.75 9.975,14.196 v1(9.975,14.775)
  Layer 1 w0.15: v1(8.275,20.2) 9.316,19.159 9.316,15.434 v1(9.975,14.775)
IO_EXPANDER_INT: R4.1 U1.37 U3.32 | length 26.8
  Top Layer w0.15: v1(0.8,19.775) 0.8,9.65 R4.1 2.175,8.275 2.175,6.45 2.675,5.95 4.001,5.95 4.175,5.776 4.175,3.925 4.55,3.55 6.55,3.55 6.975,3.975 6.975,4.6 7.325,4.95 U3.32 ; v1(0.8,22.8) 1.723,23.723 U1.37
  Bottom Layer w0.15: v1(0.8,19.775) v1(0.8,22.8)
IO_EXPANDER_nRST: R5.1 U3.28 | length 5
  Top Layer w0.15: R5.1 5.325,8.275 5.325,6.663 5.638,6.35 6.289,6.35 6.889,6.95 U3.28
IRED1: R7.1 U7.3 | length 1.3
  Top Layer w0.2: U7.3 16.2,14.055 R7.1
IRED2: R9.1 U8.3 | length 1.3
  Top Layer w0.2: U8.3 25.6,18.355 R9.1
IRED_GND: Q1.3 U7.4 U8.4 | length 47
  Top Layer w0.2: v1(16.2,16.1) 15.575,16.725 15.575,28.375 16.425,29.225 23.839,29.225 ; U7.4 v1(19.1,13.83) ; Q1.3 23.825,29.225 24.225,29.225 25.975,27.475 27.725,27.475 28.175,27.025 28.175,24.5 27.725,24.05 25.525,24.05 25.075,23.6 25.075,22.425 25.525,21.975 26.95,21.975 27.6,21.325 27.6,18.855 27.2,18.455 26.875,18.13 U8.4
  Bottom Layer w0.2: v1(16.2,16.1) 18.47,13.83 v1(19.1,13.83)
MAIN_CTRL: R10.2 U1.19 | length 14.6
  Top Layer w0.15: U1.19 8.746,27.2 11.025,27.2 v1(11.425,26.8) ; v1(19.825,30.05) R10.2
  Bottom Layer w0.15: v1(11.425,26.8) 14.95,26.8 15.575,27.425 15.575,28.4 16.4,29.225 19,29.225 v1(19.825,30.05)
MAIN_CTRL_G: Q1.1 R10.1 | length 1.3
  Top Layer w0.15: R10.1 Q1.1
MAIN_S1: R6.1 U3.22 U7.2 | length 11.2
  Top Layer w0.15: U3.22 9.2,9.675 v1(9.825,10.3) ; v1(12.025,11.325) 14.425,11.325 15.05,10.7 16.55,10.7 R6.1 R6.1@17.2,11.375
  Top Layer w0.2: R6.1 17.2,12.515 U7.2
  Bottom Layer w0.15: v1(9.825,10.3) 11,10.3 v1(12.025,11.325)
MAIN_S2: R8.1 U3.23 U8.2 | length 50.4
  Top Layer w0.15: U3.23 v1(8.7,9.975) ; v1(14.175,10.725) 15.325,9.575 15.325,9.174 18.549,5.95 23.462,5.95 24.112,5.3 26.775,5.3 27.401,4.674 30.227,4.674 32.35,6.797 32.35,7.7 33.2,8.55 33.2,12.85 32.6,13.45 31.075,13.45 30.075,14.45 28.275,14.45 27.5,15.225 v1(27.5,16.94)
  Top Layer w0.2: R8.1 v1(25.6,21.25)
  Bottom Layer w0.15: v1(8.7,9.975) 9.075,9.6 10.724,9.6 11.849,10.725 v1(14.175,10.725)
  Bottom Layer w0.2: v1(25.6,21.25) 25.6,17.45 26.11,16.94 v1(27.5,16.94)
MCU_nRST: R1.1 U1.7 | length 4.8
  Top Layer w0.15: U1.7 10.275,20.379 R1.1
MCU_RF: U1.21 U2.3 | length 5.3
  Top Layer w0.25: U1.21 8.032,27.9 cw(c9.3,26.632) 9.3,28.425 10.74,28.425 ccw(c10.74,29.535) 11.525,28.75 ccw(c10.982,29.293) 11.75,29.293 U2.3
MOTOR_C1_A: P12.1 ps.5 | length 2.1
  Top Layer w0.25: ps.5 v1(35.1,23.5)
MOTOR_C1_A_CTRL: ps.7 U1.15 | length 32.9
  Top Layer w0.15: U1.15 9.805,25.384 10.018,25.597 10.554,25.597 11.551,24.6 12.984,24.6 14,25.616 14,28.402 17.998,32.4 24.898,32.4 27.823,29.475 28.801,29.475 32.05,26.226 ps.7
MOTOR_C1_B: P13.1 ps.3 | length 1.4
  Top Layer w0.25: ps.3 34.755,22.25 35.005,22.5 v1(35.1,22.5)
MOTOR_C1_B_CTRL: ps.8 U1.12 | length 32
  Top Layer w0.15: U1.12 11.064,23.125 11.625,23.125 12.698,24.198 13.248,24.198 14.3,25.251 14.3,28.278 16.022,30 17.601,30 19.701,32.1 24.774,32.1 27.699,29.175 28.676,29.175 31.55,26.301 ps.8
MOTOR_C2_A: P14.1 U6.16 | length 2.1
  Top Layer w0.25: U6.16 v1(35.1,15.5)
MOTOR_C2_A_CTRL: U1.17 U6.14 | length 46.5
  Top Layer w0.15: U1.17 9.098,26.092 9.31,26.304 10.696,26.304 11.799,25.2 12.736,25.2 13.4,25.864 13.4,28.651 17.749,33 25.146,33 28.071,30.075 29.076,30.075 32.412,26.739 32.597,26.739 33.3,26.036 v1(33.3,25.5) ; v1(32.05,14.6) U6.14
  Bottom Layer w0.15: v1(32.05,14.6) 33.051,14.6 33.525,15.074 33.525,19.225 33.9,19.6 33.9,24.9 v1(33.3,25.5)
MOTOR_C2_B: P15.1 U6.2 | length 1.4
  Top Layer w0.25: U6.2 34.275,16.75 34.525,16.5 v1(35.1,16.5)
MOTOR_C2_B_CTRL: U1.18 U6.13 | length 49
  Top Layer w0.15: U1.18 8.745,26.445 8.957,26.657 10.766,26.657 11.923,25.5 12.611,25.5 13.1,25.989 13.1,28.775 17.625,33.3 25.275,33.3 28.2,30.375 29.2,30.375 32.536,27.039 32.861,27.039 v1(33.9,26) ; v1(31.55,14.1) U6.13
  Bottom Layer w0.15: v1(31.55,14.1) 33,14.1 33.825,14.925 33.825,19.1 34.2,19.475 34.2,24.1 34.2,25.664 33.9,25.964 v1(33.9,26)
MOTOR_C3_A: P16.1 U6.5 | length 2.1
  Top Layer w0.25: U6.5 v1(35.1,18.5)
MOTOR_C3_A_CTRL: U1.11 U6.7 | length 37.2
  Top Layer w0.15: U1.11 10.657,22.825 11.749,22.825 12.823,23.898 13.372,23.898 14.6,25.126 14.6,28.154 16.146,29.7 17.725,29.7 19.825,31.8 24.649,31.8 27.574,28.875 28.552,28.875 30.977,26.45 30.977,26.023 v1(31,26) ; v1(31.875,19.4) 31.875,18.963 32.05,18.788 U6.7
  Bottom Layer w0.15: v1(31,26) 31,20.75 31.875,19.875 v1(31.875,19.4)
MOTOR_C3_B: P17.1 U6.3 | length 1.4
  Top Layer w0.25: U6.3 34.275,17.25 34.525,17.5 v1(35.1,17.5)
MOTOR_C3_B_CTRL: U1.9 U6.8 | length 36.6
  Top Layer w0.15: U1.9 9.637,22.431 9.92,22.431 10.126,22.225 11.998,22.225 13.071,23.298 13.746,23.298 14.123,23.675 v1(14.725,23.675) ; v1(24.9,29.875) 24.906,29.869 25.731,29.869 27.325,28.275 28.304,28.275 29.8,26.779 v1(29.8,26) ; v1@30.575,19.3 30.575,18.85 30.925,18.5 U6.8
  Layer 1 w0.15: v1(14.725,23.675) 15.575,24.525 15.575,28.375 16.425,29.225 23.35,29.225 24,29.875 v1(24.9,29.875)
  Bottom Layer w0.15: v1(29.8,26) 29.8,25.05 30.4,24.45 30.4,20.05 30.575,19.875 v1(30.575,19.325)
MOTOR_M_A: P10.1 ps.16 | length 2.1
  Top Layer w0.25: ps.16 v1(35.1,20.5)
MOTOR_M_A_CTRL: ps.14 U1.16 | length 40.6
  Top Layer w0.15: U1.16 9.452,25.738 9.664,25.95 10.625,25.95 11.675,24.9 12.86,24.9 13.7,25.74 13.7,28.526 17.874,32.7 25.022,32.7 27.947,29.775 28.925,29.775 v1(32.7,26) ; ps.14 32.05,19.95 32.6,19.4 v1(32.625,19.4)
  Bottom Layer w0.15: v1(32.625,19.4) 33.275,19.4 33.6,19.725 33.6,24.1 32.7,25 v1(32.7,26)
MOTOR_M_B: P11.1 ps.2 | length 1.4
  Top Layer w0.25: ps.2 34.755,21.75 35.005,21.5 v1(35.1,21.5)
MOTOR_M_B_CTRL: ps.13 U1.10 | length 36.1
  Top Layer w0.15: U1.10 10.25,22.525 11.874,22.525 12.947,23.598 13.496,23.598 13.999,24.101 14.37,24.101 14.644,24.375 v1(14.725,24.375) ; v1(24.9,30.575) 25.449,30.575 27.449,28.575 28.428,28.575 30.4,26.603 v1(30.4,25.5) ; v1(31.2,19.675) 31.54,20.015 31.54,20.49 ps.13
  Layer 1 w0.15: v1(14.725,24.375) 15.275,24.925 15.275,28.499 16.301,29.525 23.226,29.525 24.276,30.575 v1(24.9,30.575)
  Bottom Layer w0.15: v1(30.4,25.5) 30.7,25.2 30.7,20.175 v1(31.2,19.675)
MOTOR_nSLEEP: ps.15 U3.21 U6.15 | length 47.5
  Top Layer w0.15: U3.21 9.7,9.313 9.85,9.463 9.85,9.47 11.13,10.75 13.325,10.75 18.425,5.65 23.338,5.65 23.988,5 26.651,5 27.277,4.374 30.351,4.374 32.65,6.673 32.65,7.55 33.5,8.4 33.5,13.15 34.375,14.025 v1(34.375,14.75) 32.717,14.75 32.55,14.917 U6.15 ; ps.15 32.583,20.467 32.583,20.167 33.6,19.15 v1(34.6,19.15)
  Layer 1 w0.15: v1(34.375,14.75) 34.986,14.75 35.7,15.464 35.7,18.65 35.2,19.15 v1(34.6,19.15)
T_SWCLK: P3.1 U1.41 | length 7.1
  Top Layer w0.15: U1.41 2.927,22.088 2.927,20.598 3.225,20.3 3.225,17.275 v1(3.85,16.65)
  Bottom Layer w0.15: v1(3.85,16.65) P3.1
T_SWDIO: P2.1 U1.39 | length 9.1
  Top Layer w0.15: v1(2.15,16.65) 1.6,17.2 1.6,19.75 0.525,20.825 0.525,21.725 1.275,22.475 1.9,22.475 U1.39
  Bottom Layer w0.15: P2.1 v1(2.15,16.65)
T_VCP_RX: P5.1 U1.47 | length 8
  Top Layer w0.15: v1(3.85,13.65) 5.057,14.857 5.057,19.975 U1.47
  Bottom Layer w0.15: v1(3.85,13.65) P5.1
T_VCP_TX: P4.1 U1.46 | length 9.7
  Top Layer w0.15: v1(2.139,13.708) 2.606,14.175 3.95,14.175 4.703,14.928 4.703,20.329 U1.46
  Bottom Layer w0.15: P4.1@1.489,13.058 v1(2.139,13.708)
VDD_3V3: C1.1 C2.1 C3.1 C4.1 C5.1 C6.1 C7.1 C8.1 C9.1 C10.1 C11.1 C12.1 C13.1 C19.1 P1.1 P7.1 P18.1 P19.1 P20.1 P34.1 P35.1 P36.1 R1.2 R2.2 R3.2 R4.2 R5.2 R6.2 R7.2 R8.2 R9.2 U1.1 U1.8 U1.20 U1.23 U1.31 U1.33 U1.34 U1.35 U1.40 U1.48 U3.27 U3.31 U4.5 U4.8 U4.12 | length 51.3
  Top Layer w0.15: v1(1.65,7.05) R4.2 ; v1(2.7,7.05) R3.2 ; v1(3.75,7.05) R2.2 ; v1(4.8,7.05) R5.2 ; U4.12 8.4,15.375 8.775,15.75 v1(8.8,15.75)
  Top Layer w0.2: v1(15.325,11.35) R6.2 ; R7.2 v1(18.075,15.05) ; R9.2 R8.2 v1(26.6,21.25)
  Top Layer w0.25: v1(1.075,27.175) 0.754,26.854 0.754,26.364 U1.35 U1.34 U1.33 ; C6.1 1.386,21.254 U1.40 ; C4.1@2.225,28.075 2.282,28.075 C3.1 3.525,29.318 v1(3.525,29.9) ; C4.1 2.954,27.346 2.954,26.992 3.289,26.657 U1.31 ; U1.48 6.696,18.76 6.696,18.225 6.727,18.195 6.727,17.984 C10.1 6.696,17.938 6.15,17.391 v1(6.15,17.375) ; v1(5.95,7.05) C12.1 ; v1(5.975,4.15) C11.1 6.625,4.9 7.175,5.45 U3.31 ; C12.1@6,7.8 6.65,7.8 7,7.45 U3.27 ; v1(6.075,11.75) C13.1 6.925,11.775 6.925,12.5 7.367,12.942 7.367,13.067 U4.5 ; U1.1 7.582,18.829 C8.1 v1@8.143,19.375 ; U1.23 7.436,28.718 7.436,29.468 C2.1 7.471,29.507 8.318,30.354 C1.1 ; v1@7.347,30.476 7.894,29.93 ; U1.20 8.439,27.6 11.575,27.6 12.233,26.942 12.233,26.899 12.382,26.75 C7.1 v1(12.425,25.95) ; U4.8 9.069,13.231 9.636,13.231 10.1,12.767 C19.1 v1(10.925,11.75) ; U1.8 11.375,19.986 C9.1 v1(12.15,17.825) ; v1(10.275,16) R1.2
  Bottom Layer w0.15: P1.1 v1(28,35.575)
  other v1: 8.143,19.391 2,21.875 7.331,30.476
  other v2: 17,1.575 26,1.575 16.3,2.725 25.3,2.725 34.825,13.7 21,34.825
VINT1: C14.1 ps.12 | length 1.9
  Top Layer w0.25: C14.1 30.15,20.475 30.5,20.825 30.5,21.25 ps.12
VINT2: C15.1 U6.12 | length 1.3
  Top Layer w0.25: C15.1 29.6,16.25 U6.12
pads on no net: ANT1.2 ps.6 ps.9 U1.3 U1.4 U1.13 U1.14 U1.26 U1.27 U1.28 U1.29 U1.30 U1.36 U1.38 U1.42 U1.43 U1.44 U3.24 U4.10 U4.11 U6.6 U6.9 X1.2
copper on no net: | length 1.5
  Top Layer w0.15: 4.562,27.506 4.562,27.533 ; 10.466,24.677 10.499,24.645 10.786,24.357 11.343,24.357 v3(11.7,24)

## Polygon pours and split planes (outlines as drawn)
VDD_3V3 on Layer 1 "VDD_3V3_L02_P002" (solid, remove dead copper, pour order 2): 36.4,36.4 36.4,0 0,0 0,36.4
BATT+ on Layer 1 "BATT+_L02_P001" (solid, remove dead copper, pour order 1): 36.4,36.4 36.4,15 28.1,15 28.1,28.1
GND on Layer 2 "GND_L03_P003" (solid, remove dead copper, pour order 3): 36.4,36.4 36.4,0 0,0 0,36.4
GND on Top Layer "GND_L01_P004" (hatched 90Degree grid 0.5 track 0.2, remove dead copper, pour order 4): 36.4,36.4 36.4,0 0,0 0,36.4
GND on Bottom Layer "GND_L04_P005" (hatched 90Degree grid 0.5 track 0.2, remove dead copper, pour order 5): 36.403,36.393 36.403,-0.007 0.003,-0.007 0.003,36.393

## Keep-outs
Top Layer:
  rectangle: 7.5,31.3 16.5,37.4
Layer 1:
  rectangle: 7.5,31.3 16.5,37.4
Layer 2:
  rectangle: 7.5,31.3 16.5,37.4
Bottom Layer:
  rectangle: 7.5,31.3 16.5,37.4

## Other copper
Top Layer:
  rectangle net BATT+: 29.225,21.25 30.025,24.55
  rectangle net BATT+: 29.225,16.925 30.025,19.025
  region net GND: 7.725,13.2 7.725,12 7.725,11.65 9.375,11.65 9.375,12 8.575,12 8.575,12.475 8.575,13.2
Bottom Layer:
  text "SamC" at 18.323,7.906 h1.4

## Silkscreen, mask and mechanical layers (free items; w line width, h text height)
Top Overlay:
  lines w0.2: 13,0.5 13,35.9 ; 20.2,0.5 20.2,9.127 ; 20.2,13.5 20.2,11.627 ; 20.2,29.1 20.2,35.9 ; 25,23.682 29.413,23.682 29.413,27.882 25,27.882 ; 25.517,7.904 ccw(c27.958,8.442) 28.496,10.883 ; 20.2,9.127 20.2,11.627 ; 20.2,9.127 18.2,9.127 18.2,11.627 20.2,11.627 ; 9.2,18.626 9.2,21.393 11.935,21.393 11.935,18.626 9.2,18.626
  text "Cube Brain V0.2 / s2cube 06/06/20" at 15.75,18.7 h1.2 r90
Bottom Overlay:
  lines w0.2: 9.2,24 10.9,24 10.3,24.6 ; 10.302,23.403 10.902,24.003
  text "EXTB5" at 20.3,36 h1.2 r90
  text "3V3" at 27.1,35.95 h1.2 r90
  text "VDD" at 21.397,34.2 h1.2 r90
  text "GND" at 22.397,34.2 h1.2 r90
  text "CTRL" at 23.397,34.2 h1.2 r90
  text "S1" at 24.397,34.2 h1.2 r90
  text "S2" at 25.397,34.2 h1.2 r90
  text "3V3" at 29.35,31.756 h1.5 r45
  text "GND" at 30.955,30.453 h1.5 r45
  text "BAT" at 32.418,28.839 h1.5 r45
  text "C1_A" at 34.4,23.002 h1
  text "C1_B" at 34.4,22.086 h1
  text "Connect to BAT" at 11.239,21.603 h1
  text "M_B" at 34.4,21.086 h1
  text "M_A" at 34.4,20.091 h1
  text "C3_A" at 34.4,18.086 h1
  text "C3_B" at 34.4,17.086 h1
  text "DIO" at 2.65,17 h1.2
  text "CLK" at 5.65,17 h1.2
  text "C2_B" at 34.4,16.086 h1
  text "C2_A" at 34.4,15.086 h1
  text "VDD" at 34.4,13.303 h1.2
  text "GND" at 34.4,12.303 h1.2
  text "CTRL" at 34.4,11.303 h1.2
  text "TX" at 2.65,11 h1.2
  text "RX" at 5.65,11 h1.2
  text "S1" at 34.4,10.303 h1.2
  text "S2" at 34.4,9.303 h1.2
  text "EXTB6" at 35.9,7.9 h1.2
  text "EXTB4" at 30.6,5.4 h1.2
  text "(S3)" at 9.496,4.4 h1.2 r270
  text "S2" at 11.003,4.4 h1.2 r270
  text "S1" at 12.403,4.4 h1.2 r270
  text "CTRL" at 13.803,4.4 h1.2 r270
  text "GND" at 15.203,4.4 h1.2 r270
  text "VDD" at 16.603,4.4 h1.2 r270
  text "(S3)" at 18.496,4.4 h1.2 r270
  text "S2" at 20.003,4.4 h1.2 r270
  text "S1" at 21.403,4.4 h1.2 r270
  text "CTRL" at 22.803,4.4 h1.2 r270
  text "GND" at 24.203,4.4 h1.2 r270
  text "VDD" at 25.603,4.4 h1.2 r270
  text "EXTB1" at 30.6,4.1 h1.2
  text "EXTB3" at 9.4,3 h1.2
  text "GND" at 31.45,2.4 h1.2
  text "EXTB2" at 9.4,1.7 h1.2
Bottom Solder:
  rectangle: 14.75,7.775 18.45,8.975
Mechanical 1:
  lines w0.8: 0,9.158 ccw(c5,9.158) 0.875,6.332 ccw(c18.2,18.2) 6.332,0.875 ccw(c9.158,5) 9.158,0 27.242,0 ccw(c27.242,5) 30.068,0.875 ccw(c18.2,18.2) 35.525,6.332 ccw(c31.4,9.158) 36.4,9.158 36.4,27.242 ccw(c31.4,27.242) 35.525,30.068 ccw(c18.2,18.2) 30.068,35.525 ccw(c27.242,31.4) 27.242,36.4 9.158,36.4 ccw(c9.158,31.4) 6.332,35.525 ccw(c18.2,18.2) 0.875,30.068 ccw(c5,27.242) 0,27.242 0,9.158 ; 16.2,18.2 ccw(c18.2,18.2) 17.901,16.223 cw(c17.752,15.234) 18.459,15.941 20.879,13.521 cw(c20.172,12.814) 21.148,12.597 ccw(c24.564,11.836) 25.842,8.578 cw(c26.025,8.112) 26.378,8.466 27.18,7.664 ccw(c27.958,8.442) 28.736,9.22 27.934,10.022 cw(c28.288,10.375) 27.822,10.558 ccw(c24.564,11.836) 25.255,15.267 cw(c25.452,16.248) 24.452,16.248 24.452,24.144 cw(c24.952,24.144) 24.952,24.644 27.052,24.644 ccw(c27.052,25.144) 27.552,25.144 27.552,26.344 ccw(c27.052,26.344) 27.052,26.844 24.952,26.844 cw(c24.952,27.344) 24.452,27.344 24.452,27.608 ccw(c23.452,27.608) 23.452,28.608 17.2,28.608 ccw(c17.2,27.608) 16.2,27.608 16.2,18.2

## Text inside footprints (layer, text, board x,y; h text height)
ANT1: Top Courtyard "Keep Clear / No ground plane" at 12.432,31.364 h0.6